# Altium PCB main.PcbDoc
Units mm, origin at the board's own origin, x right, y up, seen from the top; angles counter-clockwise.
Board outline 86.5 x 64.5 mm, 4 copper layers (VCC + Logic, GND + Logic, Logic 1, Logic 2), stack 0.603 mm thick; 22 components, 33 nets, 142 pads, 3 vias.
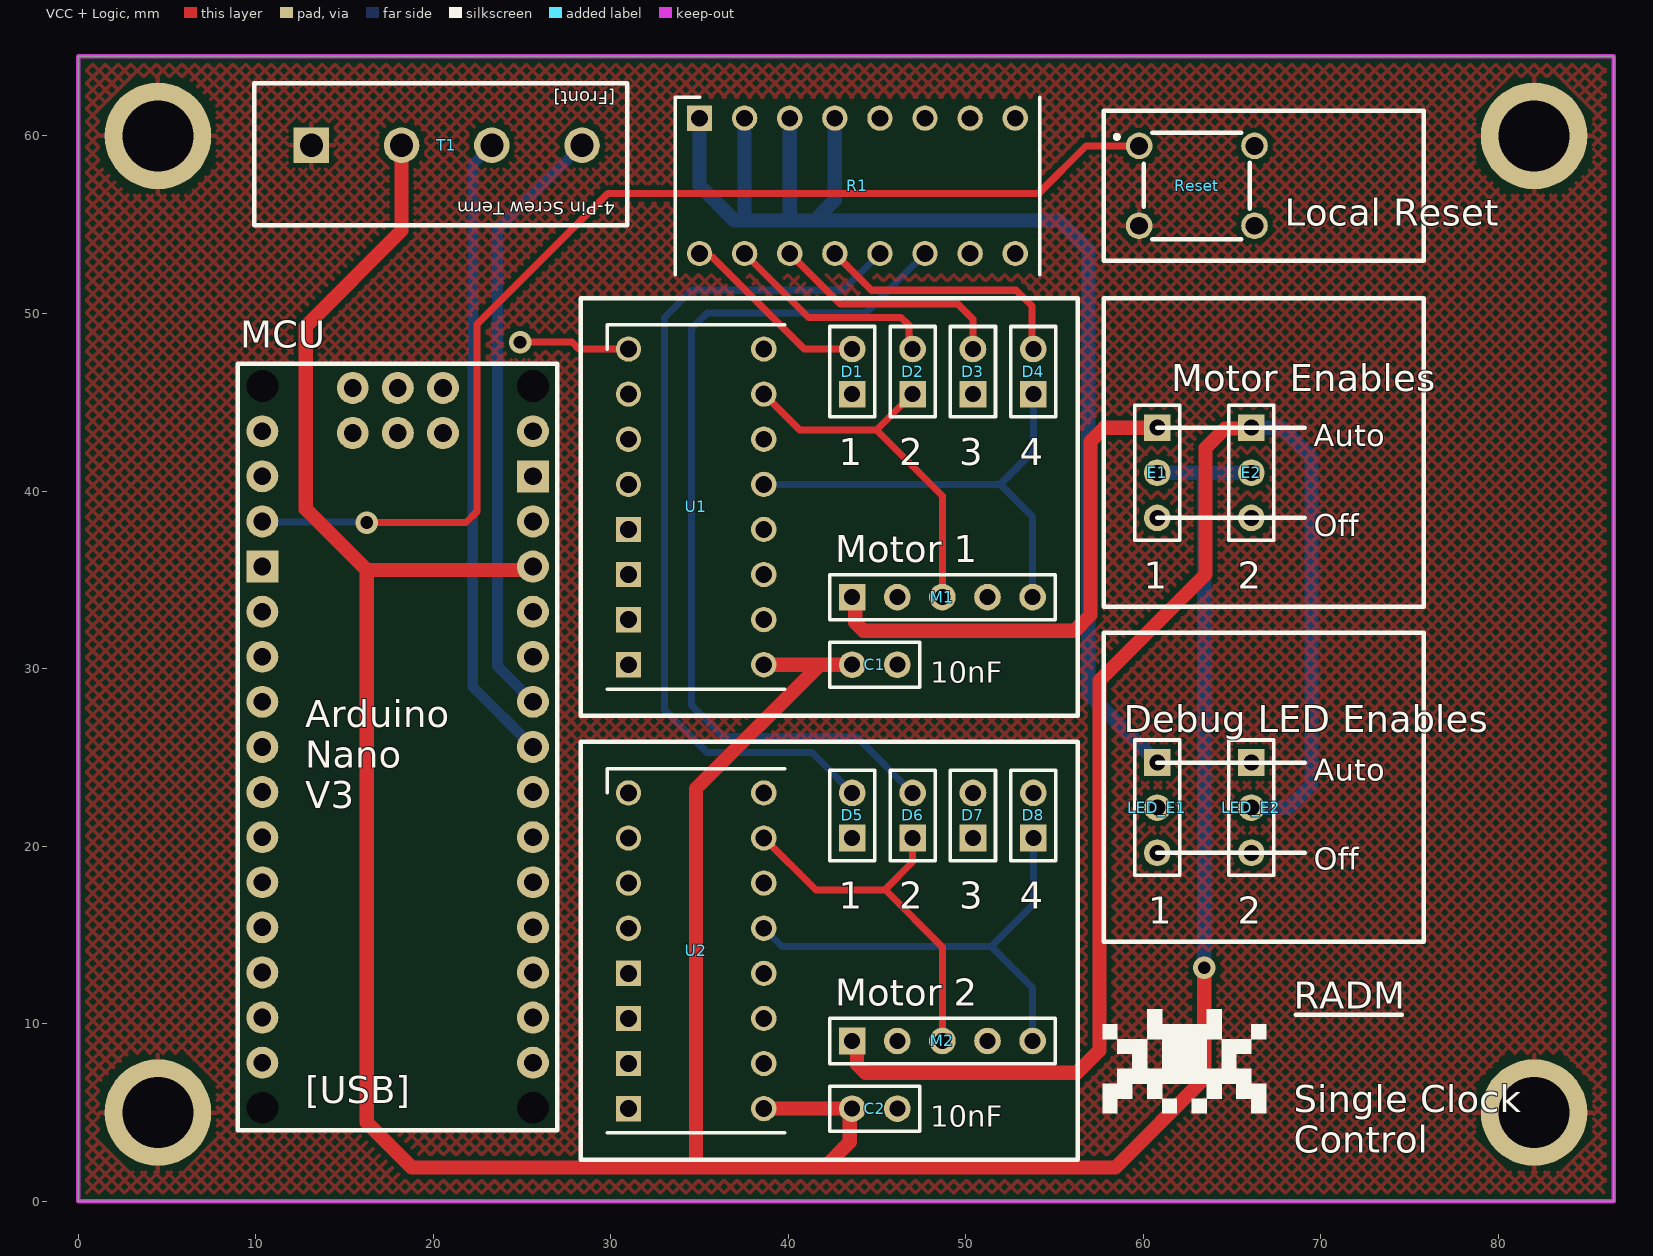
[diagram p0: VCC + Logic view]
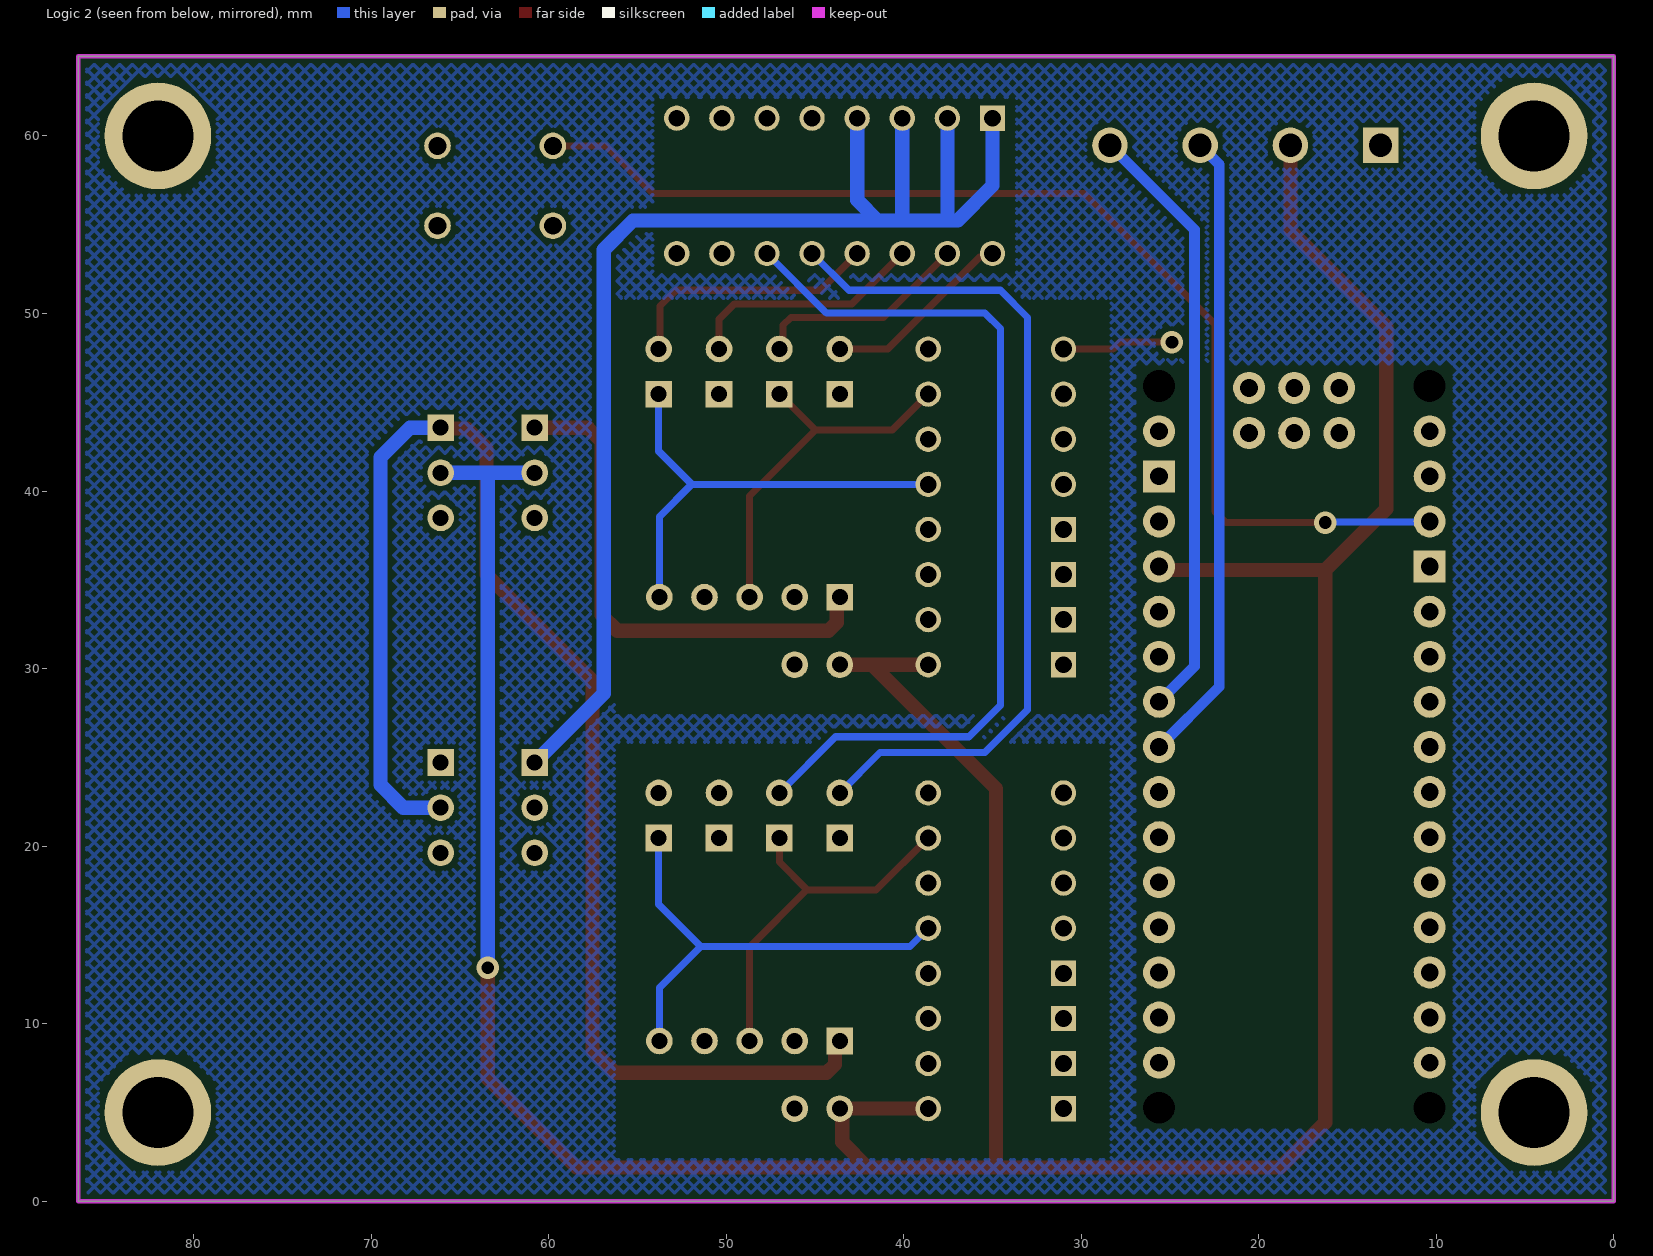
[diagram p1: Logic 2 view, seen from below]
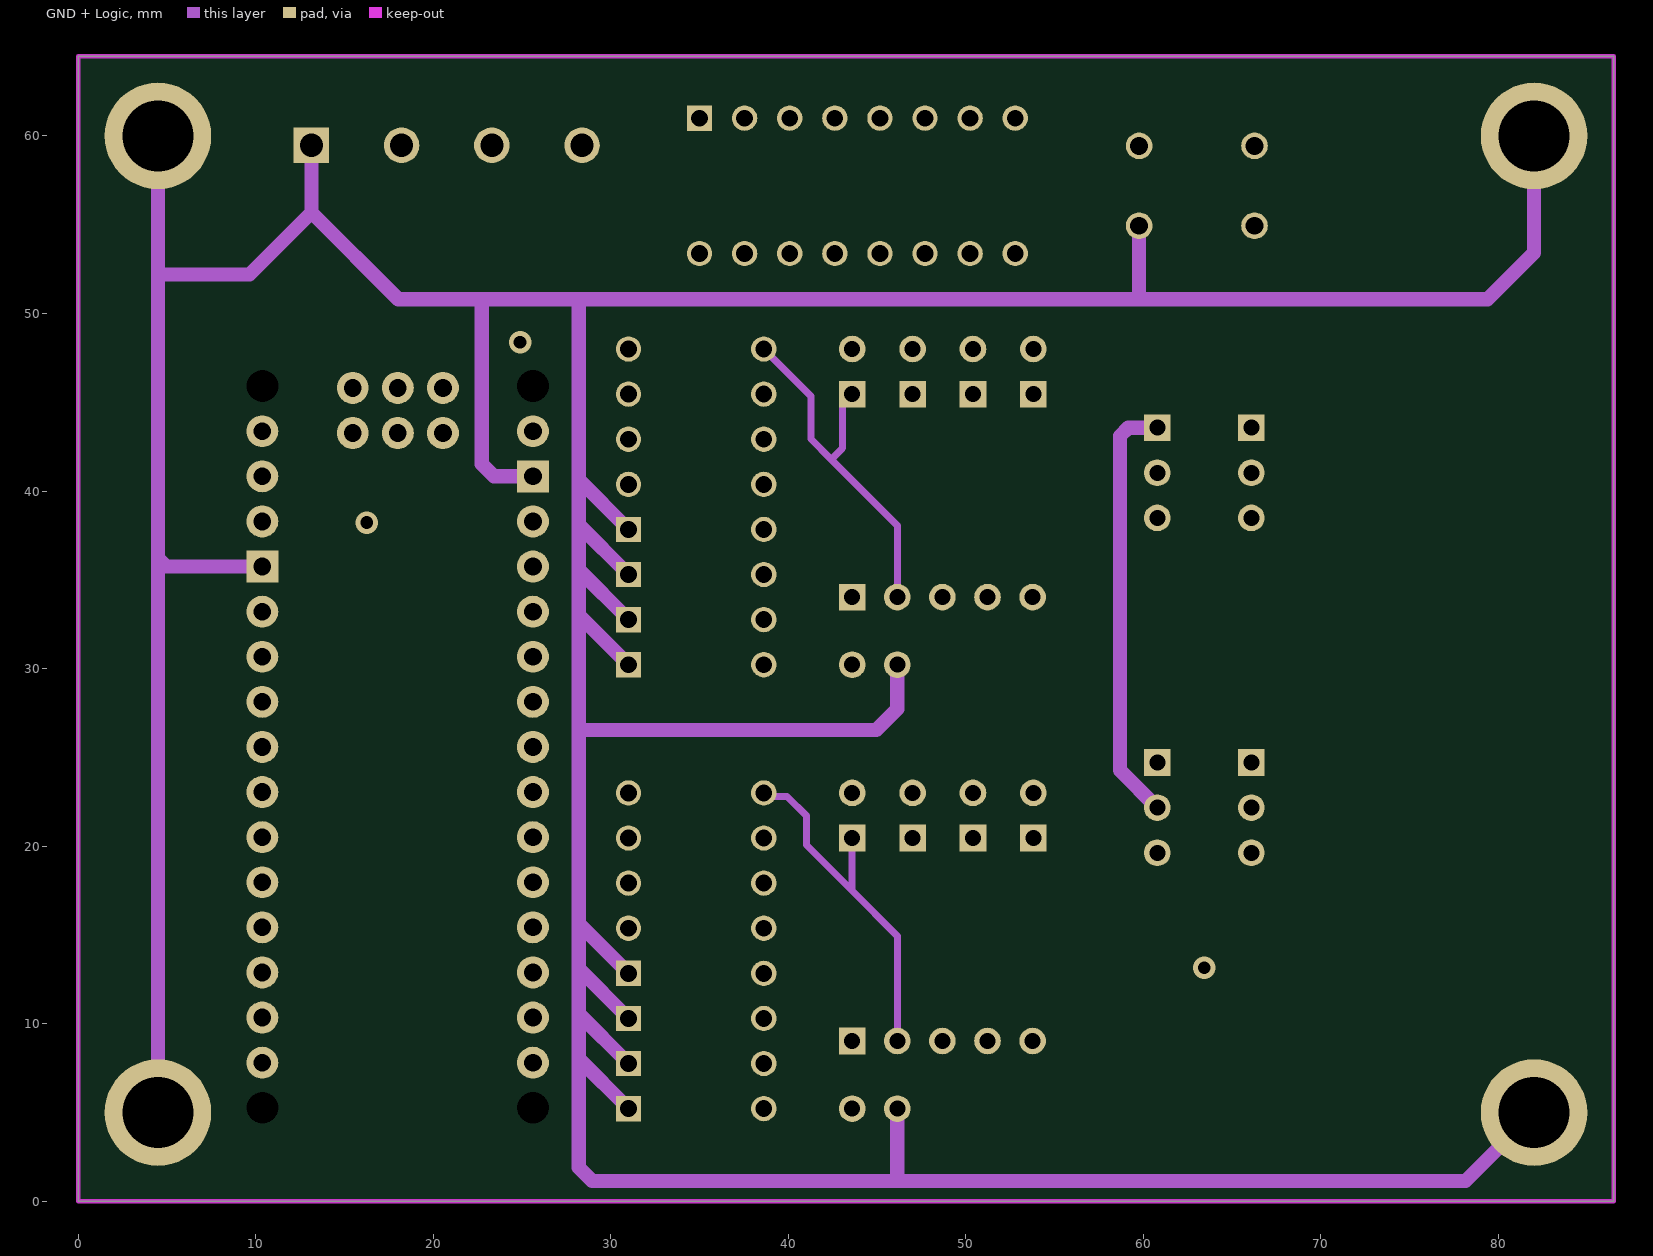
[diagram p2: GND + Logic]
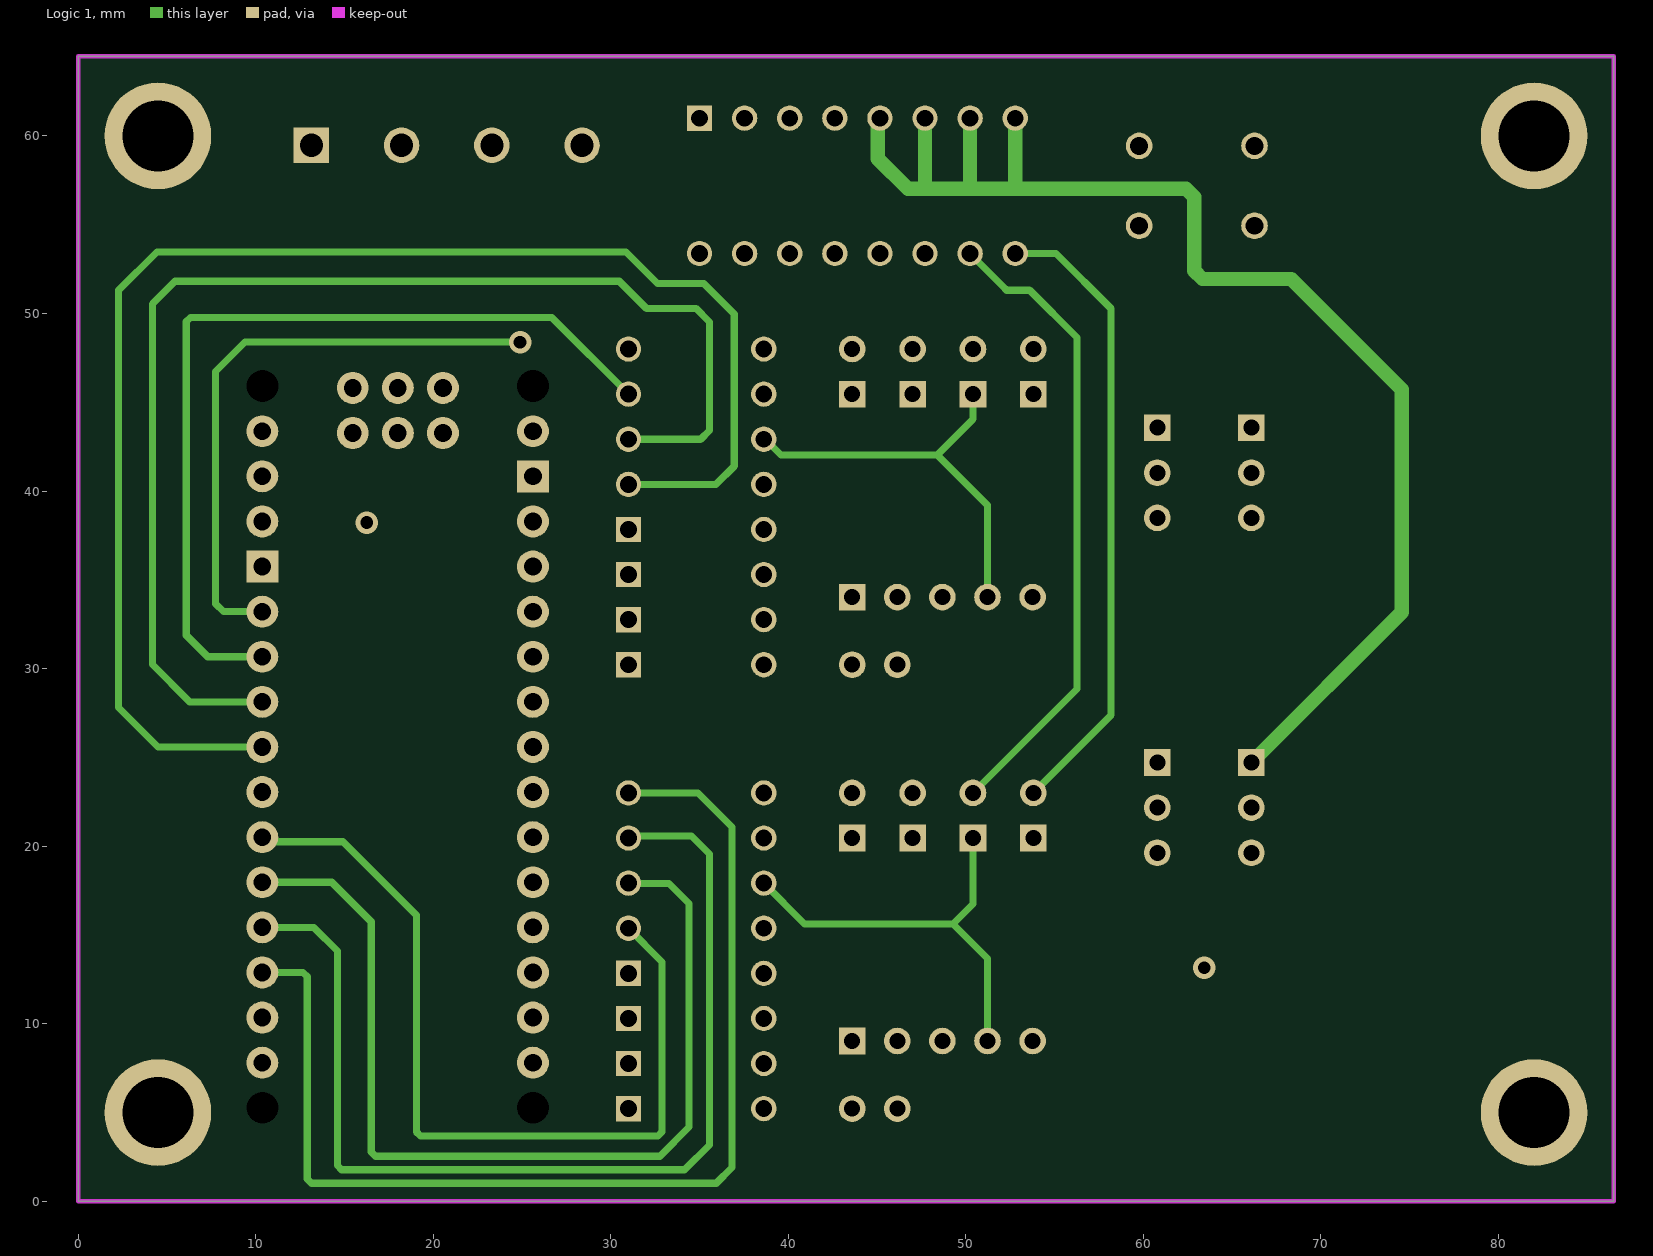
[diagram p3: Logic 1]

## Layer stack, top to bottom
Top Solder: solder mask 0.0102, Solder Resist, Dk 3.5
VCC + Logic: signal copper 0.0356
Dielectric 2: prepreg 0.0711, PP-006, Dk 4.1
GND + Logic: signal copper 0.035
Dielectric 1: dielectric 0.32, FR-4, Dk 4.8
Logic 1: signal copper 0.035
Dielectric 3: prepreg 0.0711, PP-006, Dk 4.1
Logic 2: signal copper 0.0356
Bottom Solder: solder mask 0.0102, Solder Resist, Dk 3.5

## Board outline
0,0 0,64.5 86.5,64.5 86.5,0

## Design rules (kind name [scope] priority, off if disabled: settings)
Clearance [All] p1: gap=0.254 ignorepadtopadclearanceinfootprint=FALSE except(0: Arc-Hole Track-Hole SMDPad-Hole THPad-Hole Via-Hole Fill-Hole Poly-Hole Region-Hole Text-Hole)
PolygonConnect [All] p1: connectstyle=Relief reliefconductorwidth=0.254 reliefentries=4 polygonreliefangle="90 Angle" airgapwidth=0.254
RoutingVias [All] p1: holewidth=0.711 width=1.27 viastyle="Through Hole" minholewidth=0.711 minwidth=1.27 maxholewidth=0.711 maxwidth=1.27
SolderMaskExpansion [All] p1: expansion=0.102 istentingtop=FALSE
Width "Thick VCC & GND" [(InNet('GND') OR InNet('VCC') OR InNet('Enabled_VCC_1') OR InNet('Enabled_VCC_2') OR InNet('NetLED_E1_1') OR InNet('NetLED_E2_1'))] p1: maxlimit=0.8 minlimit=0.4 preferedwidth=0.8
Width "Regular Width" [All] p2: maxlimit=0.8 minlimit=0.4 preferedwidth=0.4
30 further rules are at their usual default settings.

## Components (designator, comment, footprint, x,y, rotation, side; value= is the part's Value field where it differs from the comment)
C1 "Cap" HDR1X2#1 43.6,30.22 r0 top value=10nF
C2 "Cap" HDR1X2#1 46.14,5.22 r180 top value=10nF
D1 "LED0" HDR1X2#2 43.6,48 r270 top
D2 "LED0" HDR1X2#2 47,48 r270 top
D3 "LED0" HDR1X2#2 50.4,48 r270 top
D4 "LED0" HDR1X2#2 53.8,48 r270 top
D5 "LED0" HDR1X2#2 43.6,23 r270 top
D6 "LED0" HDR1X2#2 47,23 r270 top
D7 "LED0" HDR1X2#2 50.4,23 r270 top
D8 "LED0" HDR1X2#2 53.8,23 r270 top
E1 "Motor Enable Switch" HDR1X3 60.78,43.57 r270 top
E2 "Motor Enable Switch" HDR1X3 66.08,43.57 r270 top
LED_E1 "Header 3" HDR1X3 60.78,24.71 r270 top
LED_E2 "Header 3" HDR1X3 66.08,24.71 r270 top
M1 "Stepper" HDR1X5 43.6,34.03 r0 top
M2 "Stepper" HDR1X5 43.6,9.03 r0 top
MCU "Arduino Nano" "Arduino Nano" 9,4 r0 top
R1 "Socket" "16pin DIP IC Socket"#1 35,61 r270 top
Reset "Pushbutton" FSM4JH 63.007,57.19 r0 top
T1 "4pin Screw Terminal" "4pin Screw Terminal" 28.384,59.475 r180 top
U1 "Socket" "16pin DIP IC Socket"#2 31,48 r0 top
U2 "Socket" "16pin DIP IC Socket"#2 31,23 r0 top

## Footprints (in the part's own frame and the unit in brackets; to place one, negate y for a bottom-side part, rotate by r counter-clockwise, add the part's x,y. Pads: shape width x height; smd on the part's side, far side on the other; paste and mask are expansions set on the pad)
"4pin Screw Terminal" [mm]
  round 2 hole 1.3: 1(0,0) 2(5.08,0) 3(10.16,0)
  rect 2x2 hole 1.3: 4(15.24,0)
  silkscreen extent -2.54,-3.5 18.46,4.5, body extent -2.95,-3.5 17.75,4.1, height 9.99
"16pin DIP IC Socket"#1 [mm] "https://www.mouser.com/ProductDetail/TE-Connectivity/1-2199298-4?qs=fK8dlpkaUMvpL10rY9Abiw%3D%3D"
  rect 1.425x1.425 hole 0.95: 1(0,0)
  round 1.425 hole 0.95: 2(0,2.54) 3(0,5.08) 4(0,7.62) 5(0,10.16) 6(0,12.7) 7(0,15.24) 8(0,17.78) 9(7.62,17.78) 10(7.62,15.24) 11(7.62,12.7) 12(7.62,10.16) 13(7.62,7.62) 14(7.62,5.08) 15(7.62,2.54) 16(7.62,0)
  silkscreen extent -1.19,-1.37 8.81,19.15, body extent -1.19,-1.27 8.81,19.05, height 4.83
"16pin DIP IC Socket"#2 [mm] "https://www.mouser.com/ProductDetail/TE-Connectivity/1-2199298-4?qs=fK8dlpkaUMvpL10rY9Abiw%3D%3D"
  round 1.425 hole 0.95: 1(0,0) 2(0,-2.54) 3(0,-5.08) 4(0,-7.62) 9(7.62,-17.78) 10(7.62,-15.24) 11(7.62,-12.7) 12(7.62,-10.16) 13(7.62,-7.62) 14(7.62,-5.08) 15(7.62,-2.54) 16(7.62,0)
  rect 1.425x1.425 hole 0.95: 5(0,-10.16) 6(0,-12.7) 7(0,-15.24) 8(0,-17.78)
  silkscreen extent -1.19,-19.15 8.81,1.37, body extent -1.19,-19.05 8.81,1.27, height 4.83
"Arduino Nano" [mm]
  round 1.8 hole 1: 1(1.38,39.37) 2(1.38,36.83) 3(1.38,34.29) 5(1.38,29.21) 6(1.38,26.67) 7(1.38,24.13) 8(1.38,21.59) 9(1.38,19.05) 10(1.38,16.51) 11(1.38,13.97) 12(1.38,11.43) 13(1.38,8.89) 14(1.38,6.35) 15(1.38,3.81) 16(16.62,3.81) 17(16.62,6.35) 18(16.62,8.89) 19(16.62,11.43) 20(16.62,13.97) 21(16.62,16.51) 22(16.62,19.05) 23(16.62,21.59) 24(16.62,24.13) 25(16.62,26.67) 26(16.62,29.21) 27(16.62,31.75) 28(16.62,34.29) 30(16.62,39.37) A(6.47,41.81) B(9.01,41.81) C(11.55,41.81) D(6.47,39.27) E(9.01,39.27) F(11.55,39.27)
  rect 1.8x1.8 hole 1: 4(1.38,31.75) 29(16.62,36.83)
  round 1.524 hole 1.8: X(1.38,1.27) X(1.38,41.91) X(16.62,1.27) X(16.62,41.91)
  silkscreen extent 0,0 18,43.18
FSM4JH [mm]
  round 1.5 hole 1: 1(-3.25,2.25) 2(3.25,2.25) 3(-3.25,-2.25) 4(3.25,-2.25)
  silkscreen extent -4.6,-3 3,3, body extent -3.82,-3 3.98,3, height 7.61
HDR1X2#1 [mm] "Connector; Header; 2 Position"
  round 1.5 hole 0.9: 1(0,0) 2(2.54,0)
  silkscreen extent -1.27,-1.27 3.81,1.27
HDR1X2#2 [mm] "Connector; Header; 2 Position"
  round 1.5 hole 0.9: 1(0,0)
  rect 1.5x1.5 hole 0.9: 2(2.54,0)
  silkscreen extent -1.27,-1.27 3.81,1.27
HDR1X3 [mm] "Connector; Header; 3 Position"
  rect 1.5x1.5 hole 0.9: 1(0,0)
  round 1.5 hole 0.9: 2(2.54,0) 3(5.08,0)
  silkscreen extent -1.27,-1.27 6.35,1.27
HDR1X5 [mm] "Connector; Header; 5 Position"
  rect 1.5x1.5 hole 0.9: 1(0,0)
  round 1.5 hole 0.9: 2(2.54,0) 3(5.08,0) 4(7.62,0) 5(10.16,0)
  silkscreen extent -1.27,-1.27 11.43,1.27

## Part data
C1 C2: "Capacitor", LatestRevisionDate=17-Jul-2002, LatestRevisionNote="Re-released for DXP Platform.", PackageDescription="Radial Cap, Thru-Hole; 2 Leads; 0.3 in Pin Spacing", PackageReference=RAD-0.3, Published=8-Jun-2000, Publisher="Altium Limited"
D1 D2 D3 D4 D5 D6 D7 D8: "Typical INFRARED GaAs LED", LatestRevisionDate=08-Jul-2005, LatestRevisionNote="Mech Layer 1 removed.", PackageDescription="LED; 2 Leads", PackageReference=LED-0, Published=8-Jun-2000, Publisher="Altium Limited"
E1 E2: library part "Header 3", "Header, 3-Pin", LatestRevisionDate=17-Jul-2002, LatestRevisionNote="Re-released for DXP Platform.", Publisher="Altium Limited"
LED_E1 LED_E2: "Header, 3-Pin", LatestRevisionDate=17-Jul-2002, LatestRevisionNote="Re-released for DXP Platform.", Publisher="Altium Limited"
M1 M2: library part "Header 5", "Header, 5-Pin", LatestRevisionDate=17-Jul-2002, LatestRevisionNote="Re-released for DXP Platform.", Publisher="Altium Limited"
R1 U1 U2: library part 1-2199298-4, "Integrated Circuit", Manufacturer_Name="TE Connectivity", Mouser Part Number=571-1-2199298-4, Arrow Part Number=1-2199298-4, Arrow Price/Stock=https://www.arrow.com/en/products/1-2199298-4/te-connectivity?region=nac, Datasheet Link=https://www.te.com/commerce/DocumentDelivery/DDEController?Action=showdoc&DocId=Customer+Drawing%7F2199298%7FA%7Fpdf%7FEnglish%7FENG_CD_2199298_A_baseFilename.pdf%7F1-2199298-4, Height=5.1mm, Manufacturer_Part_Number=1-2199298-4, Mouser Price/Stock=https://www.mouser.co.uk/ProductDetail/TE-Connectivity/1-2199298-4?qs=fK8dlpkaUMvpL10rY9Abiw%3D%3D
Reset: "Switch", Manufacturer_Name="TE Connectivity", Manufacturer_Part_Number=FSM2JAH, Mouser Part Number=506-FSM2JAH, Datasheet Link=http://www.te.com/commerce/DocumentDelivery/DDEController?Action=showdoc&DocId=Customer+Drawing%7F1825910%7FC9%7Fpdf%7FEnglish%7FENG_CD_1825910_C9.pdf%7F1825910-3, Mouser Price/Stock=https://www.mouser.co.uk/ProductDetail/TE-Connectivity-PB/FSM2JAH?qs=Of7OaoM7rsH02ckr%252BGLHNA%3D%3D

## Free pads (board coordinates)
  round 6 hole 4: MNT(4.5,5) MNT(4.5,60) MNT(82,5) MNT(82,60)

## Via types
v1: diameter 1.27, hole 0.711, VCC + Logic to Logic 2, 3 vias

## Nets (pads, with @x,y where several pads share a name; then routed paths per layer and width w, separated by ;. In a path a pad name is that pad's centre, name@x,y a point inside that pad or via, vN(x,y) a via of type N, cw(c..) or ccw(c..) an arc to the next point about the centre after c; other vN are vias at no path point)
Enabled_VCC_1: E1.1 LED_E1.2 M1.1 | length 53.3
  VCC + Logic w0.8: M1.1 43.767,33.863 43.767,32.6 44.235,32.131 56.134,32.131 57.023,33.02 57.023,42.799 57.785,43.561 60.771,43.561 E1.1
  GND + Logic w0.8: LED_E1.2 58.674,24.276 58.674,43.101 59.143,43.57 E1.1
Enabled_VCC_2: E2.1 LED_E2.2 M2.1 | length 82.4
  VCC + Logic w0.8: M2.1 43.875,8.755 43.875,7.708 44.343,7.239 56.261,7.239 57.531,8.509 57.531,29.337 63.5,35.306 63.5,42.418 64.599,43.517 66.027,43.517 E2.1
  Logic 2 w0.8: E2.1@65.73,43.22 E2.1 67.809,43.57 69.469,41.91 69.469,23.456 68.183,22.17 LED_E2.2 LED_E2.2@65.946,22.304
GND: C1.2 C2.1 MCU.4 MCU.29 pad.MNT Reset.3 T1.4 U1.5 U1.6 U1.7 U1.8 U2.5 U2.6 U2.7 U2.8 | length 331.5
  GND + Logic w0.8: pad.MNT@4.5,5 4.5,36.219 ; pad.MNT@4.5,60 4.5,52.197 ; MCU.4 4.969,35.75 4.5,36.219 ; T1.4 13.144,55.69 ; MCU.29 23.432,40.83 22.733,41.529 22.733,50.673 22.86,50.8 ; U2.8 28.194,8.026 ; U2.7 28.194,10.566 ; U2.6 28.194,13.106 ; U2.5 28.194,15.646 ; U1.8 28.2,33.02 28.194,33.02 ; U1.7 28.194,35.566 ; U1.6 28.194,38.106 ; U1.5 28.194,40.646 ; C2.1 46.14,1.182 46.101,1.143 ; C1.2 46.14,27.725 44.958,26.543 28.194,26.543 ; Reset.3 59.757,50.867 59.69,50.8 ; pad.MNT@82,5 78.143,1.143 46.101,1.143 ; pad.MNT@82,60 82,53.425 79.375,50.8 59.69,50.8 ; 4.5,36.219 4.5,52.197 ; 4.5,52.197 9.65,52.197 13.144,55.69 ; 13.144,55.69 18.034,50.8 22.86,50.8 ; 22.86,50.8 28.194,50.8 ; 28.194,8.026 28.194,1.905 28.956,1.143 46.101,1.143 ; 28.194,8.026 28.194,10.566 ; 28.194,10.566 28.194,13.106 ; 28.194,13.106 28.194,15.646 ; 28.194,15.646 28.194,26.543 ; 28.194,26.543 28.194,33.02 ; 28.194,33.02 28.194,35.566 ; 28.194,35.566 28.194,38.106 ; 28.194,38.106 28.194,40.646 ; 28.194,40.646 28.194,50.8 ; 28.194,50.8 59.69,50.8
M1_In1: MCU.5 U1.1 | length 40
  VCC + Logic w0.4: v1(24.892,48.387) 27.815,48.387 28.202,48 U1.1
  Logic 1 w0.4: MCU.5 8.192,33.21 7.747,33.655 7.747,46.736 9.398,48.387 v1(24.892,48.387)
M1_In2: MCU.6 U1.2 | length 49.2
  Logic 1 w0.4: MCU.6 7.303,30.67 6.096,31.877 6.096,49.55 6.33,49.784 26.676,49.784 U1.2
M1_In3: MCU.7 U1.3 | length 71.1
  Logic 1 w0.4: MCU.7 6.287,28.13 4.191,30.226 4.191,50.546 5.461,51.816 30.48,51.816 32.004,50.292 34.798,50.292 35.56,49.53 35.56,43.414 35.066,42.92 U1.3
M1_In4: MCU.8 U1.4 | length 84.5
  Logic 1 w0.4: MCU.8 4.509,25.59 2.286,27.813 2.286,51.308 4.445,53.467 30.861,53.467 32.639,51.689 35.241,51.689 36.957,49.973 36.957,41.402 35.935,40.38 U1.4
M2_In1: MCU.13 U2.1 | length 64.2
  Logic 1 w0.4: MCU.13 12.676,12.89 12.911,12.656 12.911,1.25 13.145,1.016 35.941,1.016 36.83,1.905 36.83,21.082 34.912,23 U2.1
M2_In2: MCU.12 U2.2 | length 59.9
  Logic 1 w0.4: MCU.12 13.272,15.43 14.605,14.097 14.605,2.012 14.839,1.778 34.163,1.778 35.56,3.175 35.56,19.558 34.544,20.574 31.114,20.574 U2.2
M2_In3: MCU.11 U2.3 | length 55.2
  Logic 1 w0.4: MCU.11 14.288,17.97 16.51,15.748 16.51,2.774 16.744,2.54 32.766,2.54 34.417,4.191 34.417,16.764 33.274,17.907 31.013,17.907 U2.3
M2_In4: MCU.10 U2.4 | length 49
  Logic 1 w0.4: MCU.10 10.639,20.251 14.928,20.251 19.05,16.129 19.05,3.917 19.284,3.683 32.659,3.683 32.893,3.917 32.893,13.487 U2.4
NetD1_2: D1.2 M1.2 U1.16 | length 21.3
  GND + Logic w0.4: U1.16 41.275,45.345 41.275,42.926 42.418,41.783 ; D1.2 43.05,44.91 43.05,42.415 42.418,41.783 ; M1.2 46.14,38.061 42.418,41.783
NetD2_2: D2.2 M1.3 U1.15 | length 21
  VCC + Logic w0.4: U1.15 40.646,43.434 44.974,43.434 ; D2.2 44.974,43.434 ; M1.3 48.68,39.728 44.974,43.434
NetD3_2: D3.2 M1.4 U1.14 | length 23.6
  Logic 1 w0.4: U1.14 38.71,42.92 39.593,42.037 48.387,42.037 ; D3.2 50.4,44.05 48.387,42.037 ; M1.4 51.22,39.204 48.387,42.037
NetD4_2: D4.2 M1.5 U1.13 | length 26.3
  Logic 2 w0.4: U1.13 51.937,40.38 ; M1.5 53.76,38.557 51.937,40.38 ; D4.2 53.8,42.243 51.937,40.38
NetD5_2: D5.2 M2.2 U2.16 | length 20.7
  GND + Logic w0.4: U2.16 38.814,22.806 39.932,22.806 41.021,21.717 41.021,20.066 43.58,17.507 ; D5.2@43.58,20.44 43.58,17.507 ; M2.2 46.14,14.947 43.58,17.507
NetD6_2: D6.2 M2.3 U2.15 | length 21.5
  VCC + Logic w0.4: U2.15 41.554,17.526 45.466,17.526 ; D6.2 47,19.105 45.466,17.571 45.466,17.526 ; M2.3 48.68,14.312 45.466,17.526
NetD7_2: D7.2 M2.4 U2.14 | length 24.3
  Logic 1 w0.4: U2.14 40.919,15.621 49.276,15.621 ; D7.2 50.4,16.745 49.276,15.621 ; M2.4 51.22,13.677 49.276,15.621
NetD8_2: D8.2 M2.5 U2.13 | length 26.6
  Logic 2 w0.4: U2.13 39.649,14.351 51.435,14.351 ; M2.5 53.76,12.026 51.435,14.351 ; D8.2 53.8,16.716 51.435,14.351
NetLED_E1_1: LED_E1.1 R1.1 R1.2 R1.3 R1.4 | length 75.5
  Logic 2 w0.8: R1.1 35,57.202 36.957,55.245 37.465,55.245 ; R1.2 37.54,55.32 37.465,55.245 ; R1.3 40.08,55.32 40.005,55.245 ; R1.4 42.62,56.388 41.477,55.245 ; LED_E1.1 56.896,28.594 56.896,53.594 55.245,55.245 41.477,55.245 ; 37.465,55.245 40.005,55.245 ; 40.005,55.245 41.477,55.245
NetLED_E2_1: LED_E2.1 R1.5 R1.6 R1.7 R1.8 | length 76.2
  Logic 1 w0.8: R1.5 45.04,60.88 45.04,58.719 46.736,57.023 47.625,57.023 ; R1.6 47.7,57.098 47.625,57.023 ; R1.7 50.24,57.075 50.292,57.023 ; R1.8 52.78,57.098 52.705,57.023 ; LED_E2.1 74.549,33.179 74.549,45.72 68.326,51.943 63.334,51.943 62.865,52.412 62.865,56.554 62.396,57.023 52.705,57.023 ; 47.625,57.023 50.292,57.023 ; 50.292,57.023 52.705,57.023
R1: D1.1 R1.16 | length 10.8
  VCC + Logic w0.4: R1.16 35.196,53.184 35.716,53.184 40.894,48.006 43.594,48.006 D1.1
R2: D2.1 R1.15 | length 12.4
  VCC + Logic w0.4: R1.15 41.136,49.784 46.355,49.784 46.79,49.349 46.79,48.21 D2.1
R3: D3.1 R1.14 | length 13.5
  VCC + Logic w0.4: R1.14 42.914,50.546 49.53,50.546 50.4,49.676 D3.1
R4: D4.1 R1.13 | length 14.8
  VCC + Logic w0.4: R1.13 44.692,51.308 52.832,51.308 53.721,50.419 53.721,48.079 D4.1
R5: D5.1 R1.12 | length 48.2
  Logic 2 w0.4: D5.1 41.327,25.273 35.433,25.273 33.02,27.686 33.02,49.784 34.544,51.308 43.088,51.308 R1.12
R6: D6.1 R1.11 | length 50.6
  Logic 2 w0.4: D6.1 43.838,26.162 36.322,26.162 34.544,27.94 34.544,49.149 35.433,50.038 44.358,50.038 R1.11
R7: D7.1 R1.10 | length 36.1
  Logic 1 w0.4: R1.10 52.07,51.55 52.07,51.542 52.304,51.308 53.594,51.308 56.261,48.641 56.261,28.861 D7.1
R8: D8.1 R1.9 | length 35.8
  Logic 1 w0.4: R1.9 55.078,53.38 58.186,50.272 58.186,27.386 D8.1
Reset: MCU.3 Reset.1 | length 64.4
  VCC + Logic w0.4: v1(16.256,38.227) 21.844,38.227 22.479,38.862 22.479,49.403 29.845,56.769 54.102,56.769 56.773,59.44 Reset.1
  Logic 2 w0.4: MCU.3 10.412,38.258 16.225,38.258 v1(16.256,38.227)
SCL: MCU.24 T1.1 | length 34.1
  Logic 2 w0.6: MCU.24 23.622,30.128 23.622,54.713 T1.1
SDA: MCU.23 T1.2 | length 35.7
  Logic 2 w0.6: T1.2 22.225,58.396 22.225,28.985 MCU.23
VCC: C1.1 C2.2 E1.2 E2.2 MCU.27 T1.3 U1.9 U2.9 | length 203.3
  VCC + Logic w0.8: T1.3 18.224,54.673 12.827,49.276 12.827,38.989 16.256,35.56 ; MCU.27 25.43,35.56 16.256,35.56 ; 38.62,2.044 38.481,1.905 ; U2.9 C2.2 43.466,5.086 43.466,3.334 42.037,1.905 ; U1.9 41.777,30.22 ; C1.1 41.777,30.22 ; v1(63.43,13.151) 63.43,6.915 58.42,1.905 42.037,1.905 ; 16.256,35.56 16.256,4.445 18.796,1.905 34.798,1.905 ; 34.798,1.905 34.798,23.241 41.777,30.22 ; 34.798,1.905 38.481,1.905 ; 38.481,1.905 42.037,1.905
  Logic 2 w0.8: E1.2 63.43,41.03 ; v1@63.5,13.081 v1(63.43,13.151) 63.43,41.03 ; E2.2 63.43,41.03
pads on no net: E1.3 E2.3 LED_E1.3 LED_E2.3 MCU.1 MCU.2 MCU.9 MCU.14 MCU.15 MCU.16 MCU.17 MCU.18 MCU.19 MCU.20 MCU.21 MCU.22 MCU.25 MCU.26 MCU.28 MCU.30 MCU.A MCU.B MCU.C MCU.D MCU.E MCU.F MCU.X Reset.2 Reset.4 U1.10 U1.11 U1.12 U2.10 U2.11 U2.12

## Polygon pours and split planes (outlines as drawn)
GND on VCC + Logic "GND_L01_P000" (hatched 45Degree grid 0.508 track 0.203, pour order 0): 0,0 86.5,0 86.5,64.5 0,64.5
no net on Logic 2 "NONET_L04_P001" (hatched 45Degree grid 0.508 track 0.203, pour order 1): 0,0 86.5,0 86.5,64.5 0,64.5

## Keep-outs
Keep-Out Layer:
  the board outline again, w0.254

## Other copper
VCC + Logic:
  pour cut-out: 33.63,62.19 54.15,62.19 54.15,52.19 33.63,52.19
  pour cut-out: 28.31,25.87 56.3,25.87 56.3,2.35 28.31,2.35
  pour cut-out: 28.31,50.87 56.3,50.87 56.3,27.35 28.31,27.35
  pour cut-out: 9,47.18 27,47.18 27,4 9,4
Logic 2:
  pour cut-out: 33.63,62.19 54.15,62.19 54.15,52.19 33.63,52.19
  pour cut-out: 9,47.18 27,47.18 27,4 9,4
  pour cut-out: 28.31,50.87 56.3,50.87 56.3,27.35 28.31,27.35
  pour cut-out: 28.31,25.87 56.3,25.87 56.3,2.35 28.31,2.35

## Silkscreen, mask and mechanical layers (free items; w line width, h text height)
Top Overlay:
  region: 60.213,9.329 60.213,10.814 61.051,10.814 61.051,9.976 63.566,9.976 63.566,10.814 64.404,10.814 64.404,9.137 63.566,9.137 63.566,7.461 64.404,7.461 64.404,9.137 66.08,9.137 66.08,8.299 65.242,8.299 65.242,7.461 66.08,7.461 66.08,6.623 66.919,6.623 66.919,4.946 66.08,4.946 66.08,5.785 65.242,5.785 65.242,6.623 64.404,6.623 64.404,5.785 63.566,5.785 63.566,6.623 61.051,6.623 61.051,5.785 60.213,5.785 60.213,6.623 59.375,6.623 59.375,5.785 58.537,5.785 58.537,4.946 57.698,4.946 57.698,6.623 58.537,6.623 58.537,7.461 59.375,7.461 59.375,8.299 58.537,8.299 58.537,9.137 60.213,9.137 60.213,7.461 61.051,7.461 61.051,9.137 60.213,9.137 60.213,9.321
  region: 66.203,9.137 66.08,9.137 66.08,9.976 66.919,9.976 66.919,9.137 66.211,9.137
  region: 63.566,5.671 63.566,4.946 62.728,4.946 62.728,5.785 63.566,5.785 63.566,5.68
  region: 61.383,5.785 61.889,5.785 61.889,4.946 61.051,4.946 61.051,5.785 61.374,5.785
  region: 58.528,9.137 57.698,9.137 57.698,9.976 58.537,9.976 58.537,9.137
  lines w0.254: 60.78,19.63 69.08,19.63 ; 60.78,24.71 69.08,24.71 ; 60.78,38.49 69.08,38.49 ; 60.78,43.57 69.08,43.57 ; 68.577,10.509 74.546,10.509 ; 28.31,2.35 56.3,2.35 56.3,25.87 28.31,25.87 28.31,2.35 ; 28.31,27.35 28.31,50.87 56.3,50.87 56.3,27.35 28.31,27.35 ; 57.78,14.63 75.78,14.63 75.78,32.01 57.78,32.01 57.78,14.63 ; 57.78,33.49 75.78,33.49 75.78,50.87 57.78,50.87 57.78,33.49 ; 57.78,52.963 57.78,61.417 75.78,61.417 75.78,52.963 57.78,52.963
  text "Local Reset" at 67.961,54.955 h1.52
  text "Motor Enables" at 61.575,45.625 h1.52
  text "Auto" at 69.58,42.537 h1.25
  text "1" at 42.839,41.468 h1.52
  text "2" at 46.238,41.468 h1.52
  text "3" at 49.638,41.468 h1.52
  text "4" at 53.038,41.468 h1.52
  text "Off" at 69.58,37.457 h1.25
  text "Motor 1" at 42.648,36 h1.52
  text "1" at 60.018,34.498 h1.52
  text "2" at 65.318,34.498 h1.52
  text "10nF" at 48,29.204 h1.2
  text "Debug LED Enables" at 58.879,26.415 h1.52
  text "Auto" at 69.58,23.677 h1.25
  text "Off" at 69.58,18.668 h1.25
  text "1" at 42.839,16.468 h1.52
  text "2" at 46.238,16.468 h1.52
  text "3" at 49.638,16.468 h1.52
  text "4" at 53.038,16.468 h1.52
  text "1" at 60.272,15.638 h1.52
  text "2" at 65.318,15.638 h1.52
  text "Motor 2" at 42.648,11 h1.52
  text "RADM" at 68.468,10.844 h1.52
  text "10nF" at 48,4.204 h1.2
  text "Single Clock / Control" at 68.468,2.738 h1.52

## Text inside footprints (layer, text, board x,y; h text height)
MCU: Top Overlay "[USB]" at 12.795,5.524 h1.52; Top Overlay "Arduino / Nano / V3" at 12.795,22.136 h1.52
T1: Top Overlay "[Front]" at 30.265,62.516 h0.75 r180; Top Overlay "4-Pin Screw Term" at 30.266,56.293 h0.75 r180